# Altium PCB PCB.PcbDoc
Units mm, origin at the board's own origin, x right, y up, seen from the top; angles counter-clockwise.
Board outline 80 x 100 mm, 2 copper layers (Top Layer, Bottom Layer); 37 components, 24 nets, 95 pads, 0 vias.
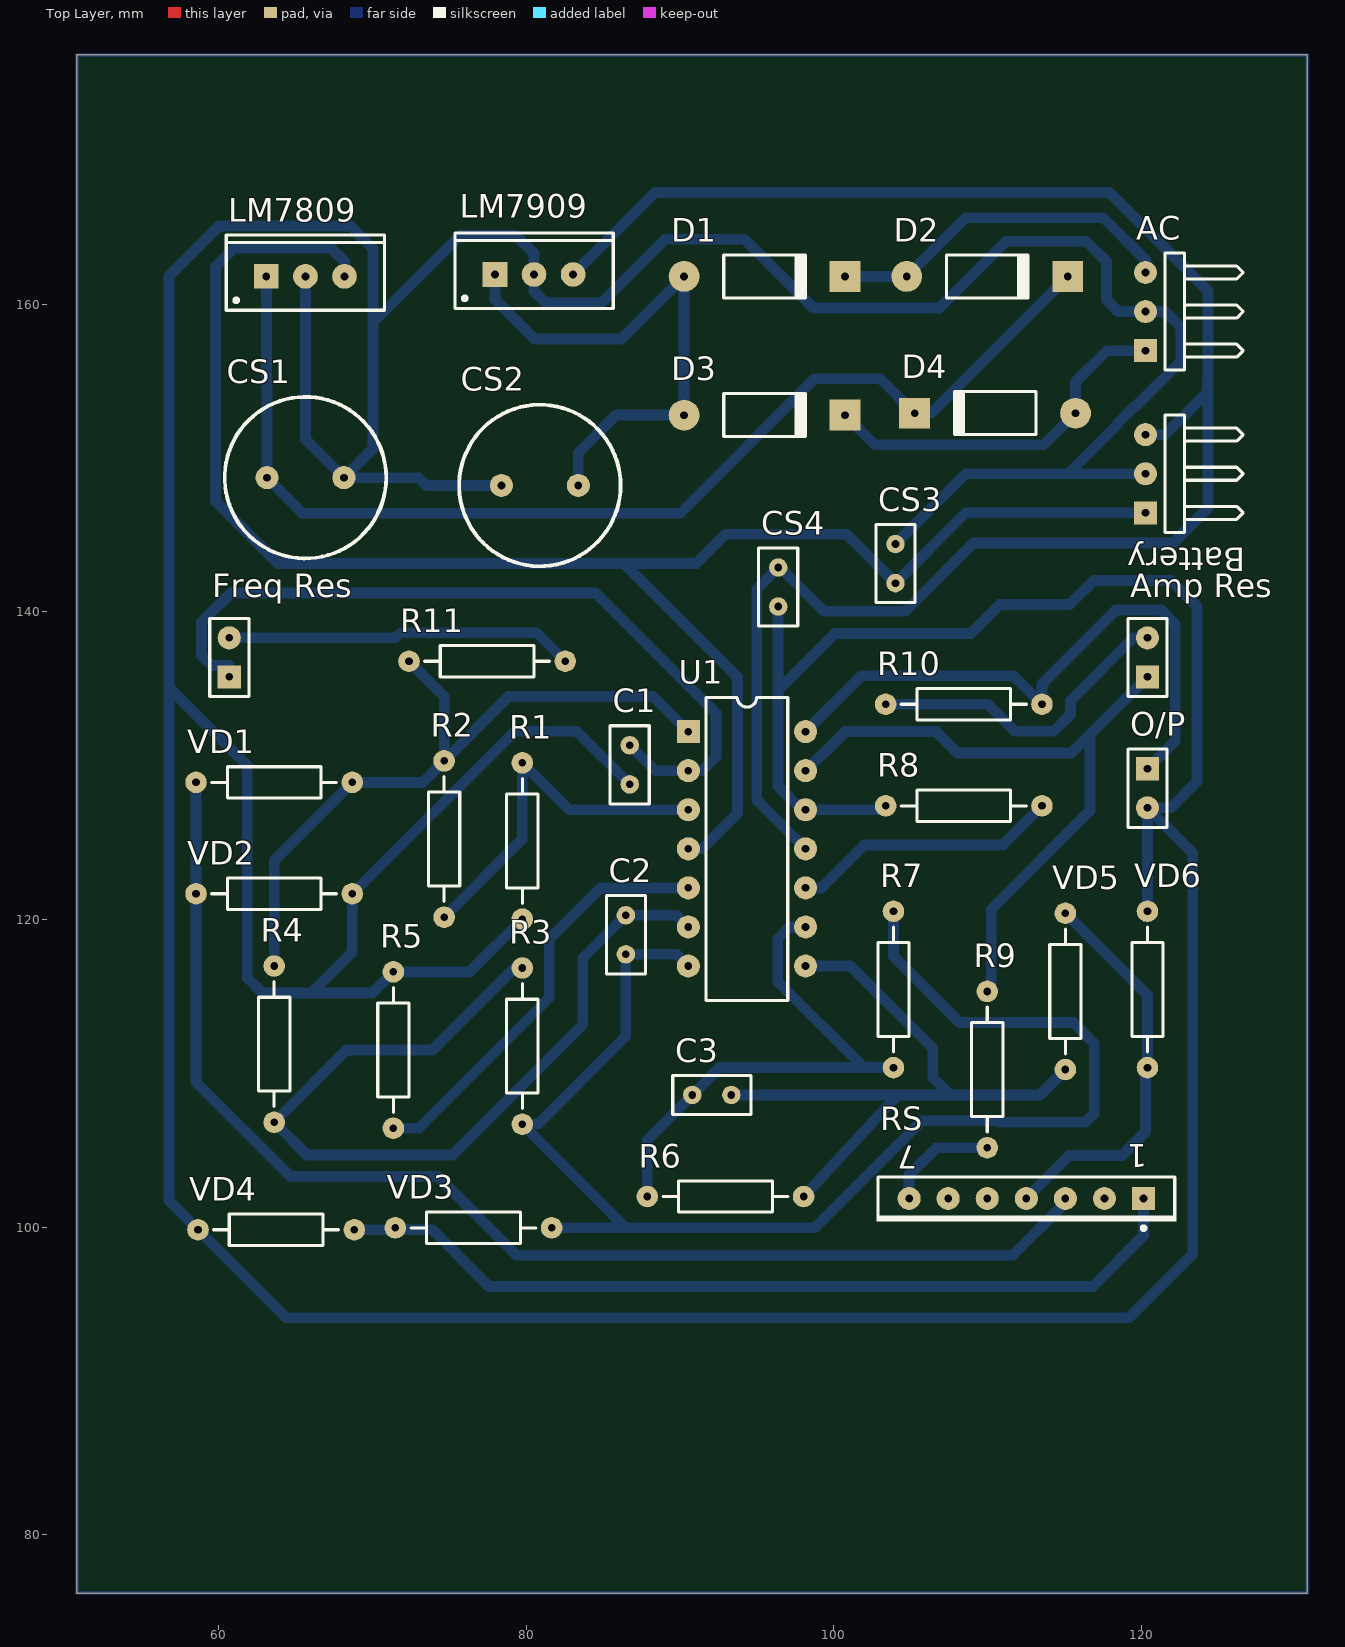
[diagram p0: Top Layer view]
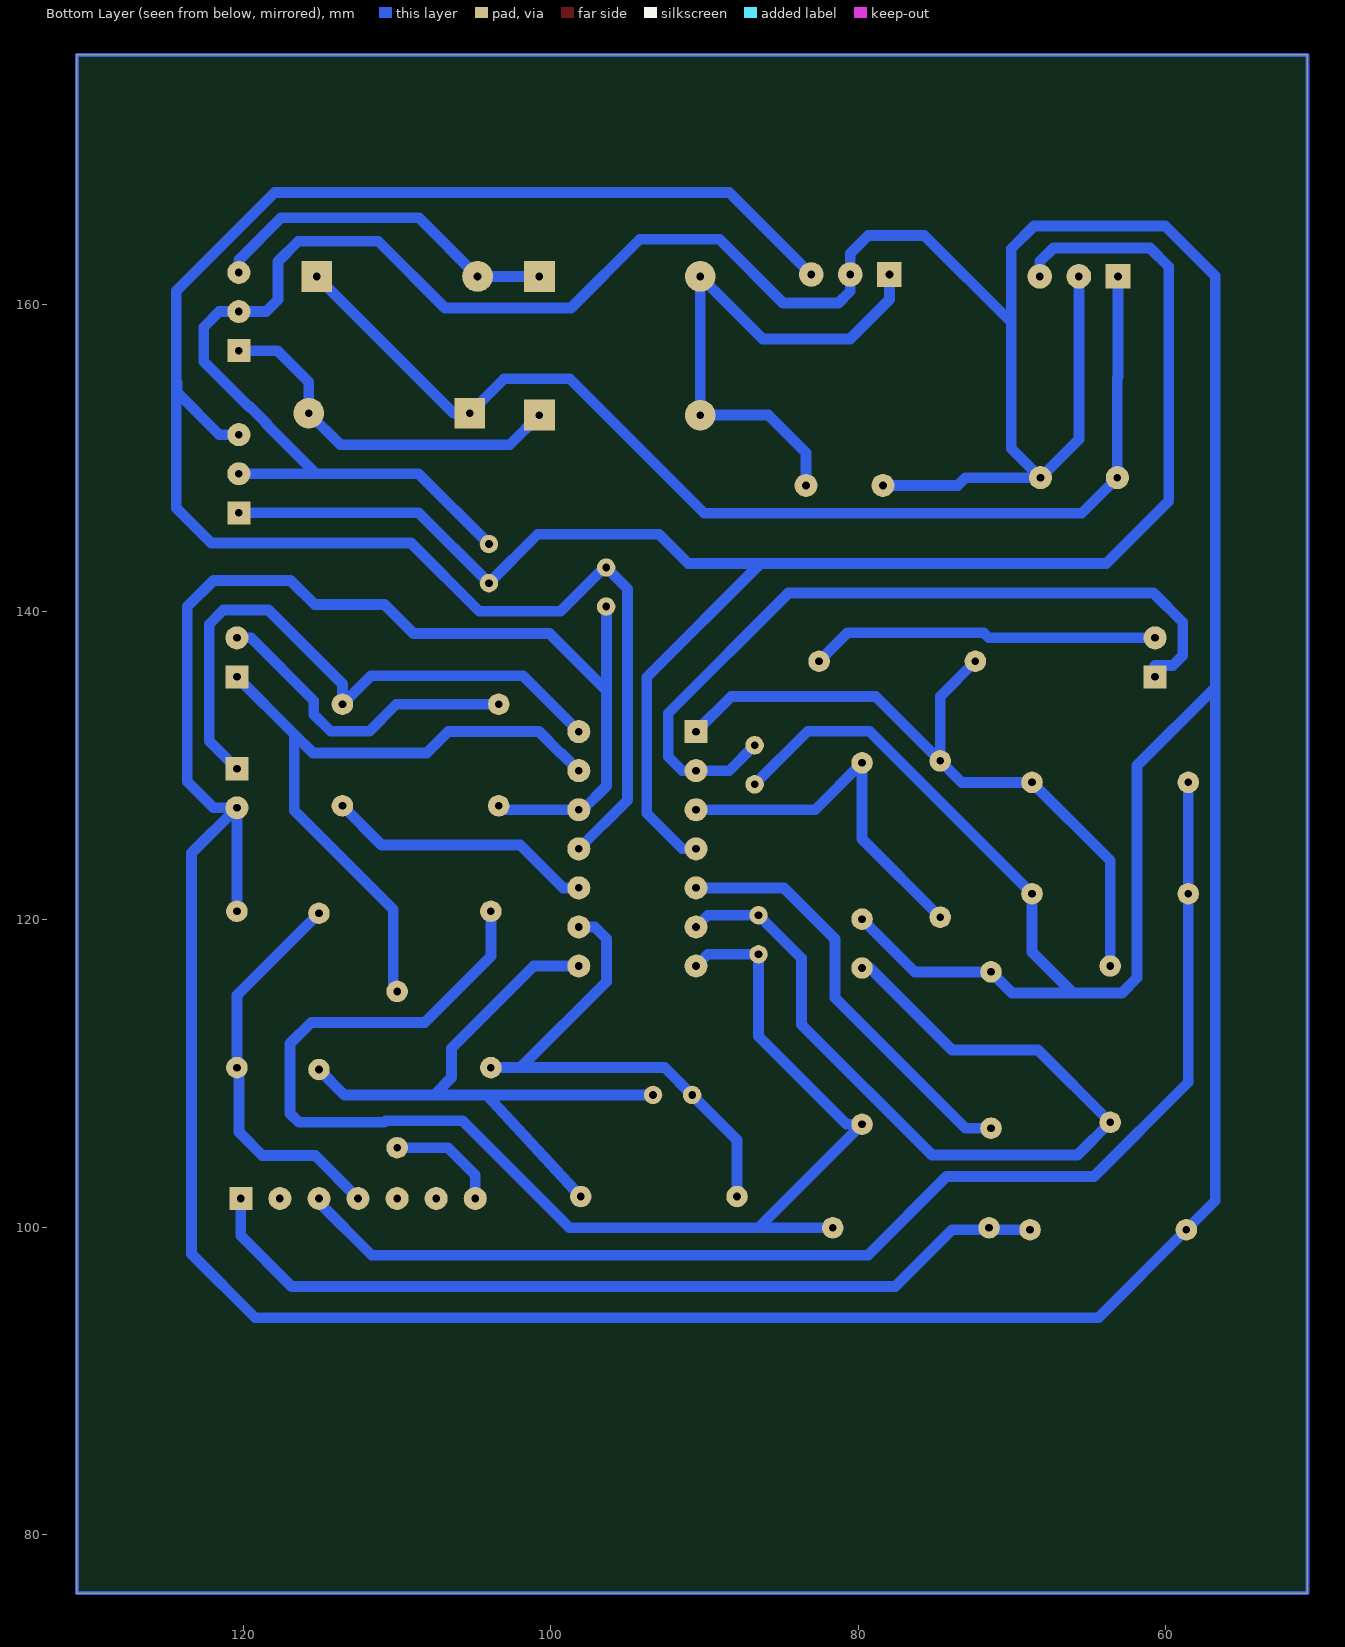
[diagram p1: Bottom Layer view, seen from below]

## Layer stack, top to bottom
Top Solder: solder mask 0.0102, Solder Resist, Dk 3.5
Top Layer: signal copper 0.0356
Dielectric 1: dielectric 0.32, FR-4, Dk 4.8
Bottom Layer: signal copper 0.0356
Bottom Solder: solder mask 0.0102, Solder Resist, Dk 3.5

## Board outline
50.8,76.2 130.8,76.2 130.8,176.2 50.8,176.2

## Design rules (kind name [scope] priority, off if disabled: settings)
Clearance "Clearance Under IC" [InNet('-VCC')] p1: gap=0.3
Clearance [All] p2: gap=0.7
PolygonConnect [All] p1: connectstyle=Relief reliefconductorwidth=0.254 reliefentries=4 polygonreliefangle="90 Angle" airgapwidth=0.254
RoomDefinition Schematic [InComponentClass('Schematic')] p1: confinementstyle=ConfineIn formatcopy=TRUE lockcomponents=FALSE outline 67.818,81.153 79.756,81.153 79.756,82.296 67.818,82.296
RoutingLayers [All] p1: top layer_v5=FALSE bottom layer_v5=TRUE
RoutingVias [All] p1: holewidth=0.3 width=0.8 viastyle="Through Hole" minholewidth=0.711 minwidth=1.27 maxholewidth=0.711 maxwidth=1.27
SolderMaskExpansion [All] p1: expansion=0.102
Width [All] p1: maxlimit=1 minlimit=0.6 preferedwidth=0.7
29 further rules are at their usual default settings.

## Components (designator, comment, footprint, x,y, rotation, side; value= is the part's Value field where it differs from the comment)
AC "Connector 1" HDR1X3H 120.269,156.972 r90 top
"Amp Res" "" HDR1X2 120.396,135.763 r90 top
Battery "" HDR1X3H 120.269,146.431 r90 top
C1 "Cap" RAD-0.1 86.741,130.048 r270 top
C2 "Cap" RAD-0.1 86.487,118.999 r90 top
C3 "" RAD-0.1 92.075,108.585 r180 top
CS1 "Cap Pol1" RB5-10.5 65.659,148.717 r0 top
CS2 "Cap Pol1" RB5-10.5 80.899,148.209 r0 top
CS3 "Cap" RAD-0.1 104.013,143.129 r270 top
CS4 "Cap" RAD-0.1 96.393,141.605 r270 top
D1 "Diode 1N4007" DO-41 95.504,161.798 r0 top
D2 "Diode 1N4007" DO-41 109.982,161.798 r0 top
D3 "Diode 1N4007" DO-41 95.504,152.781 r0 top
D4 "Diode 1N4007" DO-41 110.49,152.908 r180 top
"Freq Res" "" HDR1X2 60.706,135.763 r90 top
LM7809 "" TO-262-AA 65.659,161.798 r0 top
LM7909 "" TO-262-AA 80.518,161.925 r0 top
O/P "Connector 3" HDR1X2 120.396,129.794 r270 top
R1 "" AXIAL-0.4 79.756,125.095 r270 top
R2 "" AXIAL-0.4 74.676,125.222 r270 top
R3 "" AXIAL-0.4 79.756,111.76 r270 top
R4 "" AXIAL-0.4 63.627,111.887 r90 top
R5 "" AXIAL-0.4 71.374,111.506 r270 top
R6 "" AXIAL-0.4 92.964,101.981 r0 top
R7 "" AXIAL-0.4 103.886,115.443 r270 top
R8 "" AXIAL-0.4 108.458,127.381 r180 top
R9 "" AXIAL-0.4 109.982,110.236 r90 top
R10 "" AXIAL-0.4 108.458,133.985 r0 top
R11 "" AXIAL-0.4 77.47,136.779 r180 top
RS "" SW-7 112.522,101.854 r180 top
U1 "LM324" 646-06 94.361,124.587 r270 top
VD1 "" AXIAL-0.4 63.627,128.905 r180 top
VD2 "" AXIAL-0.4 63.627,121.666 r180 top
VD3 "" AXIAL-0.4 76.581,99.949 r0 top
VD4 "" AXIAL-0.4 63.754,99.822 r0 top
VD5 "" AXIAL-0.4 115.062,115.316 r90 top
VD6 "" AXIAL-0.4 120.396,115.443 r90 top

## Footprints (in the part's own frame and the unit in brackets; to place one, negate y for a bottom-side part, rotate by r counter-clockwise, add the part's x,y. Pads: shape width x height; smd on the part's side, far side on the other; paste and mask are expansions set on the pad)
646-06 [mm] "DIP; 14 Leads; Row Spacing 7.62 mm; Pitch 2.54 mm"
  rect 1.5x1.5 hole 0.5: 1(-7.62,-3.81)
  round 1.5 hole 0.5: 2(-5.08,-3.81) 3(-2.54,-3.81) 4(0,-3.81) 5(2.54,-3.81) 6(5.08,-3.81) 7(7.62,-3.81) 8(7.62,3.81) 9(5.08,3.81) 10(2.54,3.81) 11(0,3.81) 12(-2.54,3.81) 13(-5.08,3.81) 14(-7.62,3.81)
  silkscreen extent -9.85,-2.65 9.85,2.65
AXIAL-0.4 [mm] "Axial Device, Thru-Hole; 2 Leads; 0.4 in Pin Spacing"
  round 1.4 hole 0.5: 1(-5.08,0) 2(5.08,0)
  silkscreen extent -4.06,-1.02 4.06,1.02
DO-41 [mm] "Diode, Axial; Body 5.2 x 2.7 mm (LxDia. max), Lead Dia. 0.86 mm (max)"
  round 2 hole 0.5: 1(-5.23,0)
  rect 2x2 hole 0.5: 2(5.23,0)
  silkscreen extent -2.65,-1.4 2.75,1.4
HDR1X2 [mm] "Connector; Header; 2 Position"
  rect 1.5x1.5 hole 0.5: 1(0,0)
  round 1.5 hole 0.5: 2(2.54,0)
  silkscreen extent -1.27,-1.27 3.81,1.27
HDR1X3H [mm] "Connector; Header; 3 Position; Right Angle"
  rect 1.5x1.5 hole 0.5: 1(0,0)
  round 1.5 hole 0.5: 2(2.54,0) 3(5.08,0)
  silkscreen extent -1.27,-6.35 6.35,-1.27
RAD-0.1 [mm] "Radial Cap, Thru-Hole; 2 Leads; 0.1 in Pin Spacing"
  round 1.2 hole 0.5: 1(-1.27,0) 2(1.27,0)
  silkscreen extent -2.54,-1.27 2.54,1.27
RB5-10.5 [mm] "Capacitor (Radial); 2 Leads"
  round 1.5 hole 0.5: 1(-2.5,0) 2(2.5,0)
  silkscreen extent -5.25,-5.25 5.25,5.25
SW-7 [mm] "Switch; 7 Leads"
  rect 1.5x1.5 hole 0.5: 1(-7.62,0)
  round 1.5 hole 0.5: 2(-5.08,0) 3(-2.54,0) 4(0,0) 5(2.54,0) 6(5.08,0) 7(7.62,0)
  silkscreen extent -9.75,-1.4 9.75,2.05
TO-262-AA [mm] "TO, Thru-Hole, Vertical, Heatsink Mounted; 3 In-Line Leads; Pitch 2.54 mm"
  rect 1.6x1.6 hole 0.5: 1(-2.54,0)
  round 1.6 hole 0.5: 2(0,0) 3(2.54,0)
  silkscreen extent -5.15,-2.2 5.15,2.7, body extent -5.2,-2.25 5.2,2.75, height 19.7

## Part data
AC Battery: library part "Header 3H", "Header, 3-Pin, Right Angle"
"Amp Res" "Freq Res" O/P: library part "Header 2", "Header, 2-Pin"
C1 C2 CS3 CS4: "Capacitor"
C3: library part Cap, "Capacitor"
CS1 CS2: "Polarized Capacitor (Radial)"
D1 D2 D3 D4: "1 Amp General Purpose Rectifier"
LM7809 LM7909: library part "Volt Reg", "Voltage Regulator"
R1 R2 R3 R4 R5 R6 R7 R8 R9 R10 R11 VD1 VD2 VD3 VD4 VD5 VD6: library part Res1, "Resistor"
RS: library part SW-6WAY, "6 Way Switch"
U1: library part MC34074VP, "Single-Supply 3 to 44 V Operational Amplifier"

## Nets (pads, with @x,y where several pads share a name; then routed paths per layer and width w, separated by ;. In a path a pad name is that pad's centre, name@x,y a point inside that pad or via, vN(x,y) a via of type N, cw(c..) or ccw(c..) an arc to the next point about the centre after c; other vN are vias at no path point)
+VCC: Battery.1 CS3.2 LM7809.3 U1.4 | length 115
  Bottom Layer w0.7: LM7809.3 68.199,162.763 67.31,163.652 67.306,163.648 61.032,163.648 59.817,162.433 59.817,147.193 63.881,143.129 91.059,143.129 92.964,145.034 100.838,145.034 CS3.2 108.585,146.431 Battery.1 ; 86.36,143.129 93.751,135.738 93.751,126.898 91.44,124.587 U1.4
-VCC: Battery.3 CS4.1 LM7909.3 U1.11 | length 118.2
  Bottom Layer w0.7: LM7909.3 88.392,167.259 117.932,167.259 124.333,160.858 124.333,146.736 122.064,144.467 109.085,144.467 104.648,140.03 99.365,140.03 CS4.1@96.393,143.002 ; CS4.1 94.996,141.478 94.996,127.762 U1.11 ; Battery.3 121.539,151.511 124.282,154.254 124.282,154.889
GND: AC.2 Battery.2 C1.2 CS1.2 CS2.1 CS3.1 CS4.2 LM7809.2 LM7909.2 O/P.2 R1.2 R5.1 R8.2 U1.12 VD2.1 VD4.1 VD6.2 | length 459.3
  Bottom Layer w0.7: LM7809.2 65.659,151.217 CS1.2 ; 70.129,158.877 75.717,164.465 79.35,164.465 80.518,163.297 LM7909.2 80.518,160.837 81.28,160.075 84.891,160.075 89.027,164.211 94.209,164.211 98.679,159.741 106.865,159.741 111.209,164.084 116.411,164.084 117.729,162.766 117.729,160.274 118.491,159.512 AC.2 121.539,159.512 122.555,158.496 122.555,156.273 119.593,153.311 119.523,153.311 118.469,152.257 118.469,152.187 115.253,148.971 Battery.2 ; CS2.1 73.533,148.209 73.025,148.717 CS1.2 ; R1.2 76.327,116.586 R5.1 70.002,115.214 66.04,115.214 ; C1.2 83.287,132.232 79.273,132.232 VD2.1 68.707,117.881 66.04,115.214 ; CS4.2@96.371,140.313 96.371,134.874 ; U1.12@97.917,127.127 96.371,128.673 96.371,134.874 ; U1.12 R8.2@103.124,127.127 ; CS3.1 108.585,148.971 115.037,148.971 ; VD6.2 O/P.2 ; 56.794,135.077 56.794,161.823 60.046,165.075 68.58,165.075 70.053,163.601 70.053,150.611 CS1.2 ; 56.794,135.077 61.874,129.997 61.874,116.205 62.865,115.214 66.04,115.214 ; 56.794,135.077 56.794,101.702 VD4.1 64.389,94.107 119.202,94.107 123.342,98.247 123.342,124.308 O/P.2 ; 96.371,134.874 100.079,138.582 108.915,138.582 110.795,140.462 115.341,140.462 116.916,142.037 121.92,142.037 123.622,140.335 123.622,128.956 121.92,127.254 O/P.2
NetAC_1: AC.1 D3.2 D4.1 | length 24.1
  Bottom Layer w0.7: D3.2 102.664,150.851 113.663,150.851 D4.1 115.72,154.94 117.752,156.972 AC.1
NetAC_3: AC.3 D1.2 D2.1 | length 23.1
  Bottom Layer w0.7: D1.2 D2.1 108.562,165.608 117.526,165.608 120.269,162.865 AC.3
"NetAmp Res_1": "Amp Res.1" R9.2 U1.13 | length 45
  Bottom Layer w0.7: U1.13 99.289,130.785 99.339,130.785 100.762,132.207 106.655,132.207 108.052,130.81 115.443,130.81 116.662,132.029 ; R9.2@110.236,115.57 110.236,120.65 116.662,127.076 116.662,132.029 ; 120.396,135.763 116.662,132.029
"NetAmp Res_2": "Amp Res.2" R10.1 | length 20.8
  Bottom Layer w0.7: R10.1 110.033,133.985 111.785,132.232 114.3,132.232 115.394,133.327 115.394,134.218 119.479,138.303 120.396,138.303
NetC1_1: "Freq Res.1" C1.1 U1.2 | length 51.9
  Bottom Layer w0.7: 60.706,135.763 60.706,136.503 59.563,136.503 58.906,137.16 58.906,139.319 60.811,141.224 84.531,141.224 92.351,133.404 92.351,130.578 91.44,129.667 U1.2 88.392,129.667 C1.1
NetC2_1: C2.1 R3.2 R7.1 U1.7 VD3.2 | length 89.6
  Bottom Layer w0.7: VD3.2 86.487,99.949 ; U1.7 89.789,117.729 C2.1 86.487,112.395 80.772,106.68 R3.2 86.487,99.949 ; R7.1 103.886,117.602 108.186,113.302 115.57,113.302 116.942,111.931 116.942,107.38 116.369,106.807 110.806,106.807 110.707,106.906 105.738,106.906 98.781,99.949 86.487,99.949
NetC2_2: C2.2 R3.1 R4.1 U1.6 | length 57.4
  Bottom Layer w0.7: R3.1 79.248,116.84 73.914,111.506 68.326,111.506 R4.1 65.758,104.676 75.212,104.676 83.693,113.157 83.693,117.475 C2.2 89.789,120.269 U1.6
NetC3_1: C3.1 R6.2 U1.8 VD5.1 | length 45.4
  Bottom Layer w0.7: C3.1 104.179,108.585 ; R6.2 104.179,108.585 ; U1.8 101.092,116.967 106.439,111.62 106.439,109.715 107.569,108.585 ; VD5.1 113.411,108.585 107.569,108.585 ; 104.179,108.585 107.569,108.585
NetC3_2: C3.2 R6.1 R7.2 U1.9 | length 34.4
  Bottom Layer w0.7: R6.1 87.884,105.664 C3.2 92.583,110.363 101.956,110.363 ; U1.9 97.13,119.507 96.368,118.745 96.368,115.951 101.956,110.363 ; R7.2 101.956,110.363
NetCS1_1: CS1.1 D2.2 D4.2 LM7809.1 | length 74.3
  Bottom Layer w0.7: LM7809.1 63.119,155.259 63.159,155.219 CS1.1 65.47,146.406 90.021,146.406 98.759,155.143 103.025,155.143 D4.2 106.322,152.908 D2.2
NetCS2_2: CS2.2 D1.1 D3.1 LM7909.1 | length 35.7
  Bottom Layer w0.7: LM7909.1 77.978,160.299 80.543,157.734 86.21,157.734 D1.1 D3.1 85.852,152.781 83.399,150.328 CS2.2
"NetFreq Res_2": "Freq Res.2" R11.1 | length 22.7
  Bottom Layer w0.7: 60.706,138.303 71.526,138.303 71.857,138.633 80.696,138.633 R11.1
NetO/P_1: O/P.1 R10.2 U1.14 | length 40.1
  Bottom Layer w0.7: U1.14 101.803,135.839 111.684,135.839 R10.2 113.538,135.293 118.351,140.106 121.285,140.106 122.199,139.192 122.199,131.597 O/P.1
NetR1_1: R1.1 R2.2 U1.3 | length 24.2
  Bottom Layer w0.7: R2.2 79.756,125.222 R1.1 82.804,127.127 U1.3
NetR2_1: R2.1 R4.2 R11.2 U1.1 VD1.1 | length 46.6
  Bottom Layer w0.7: R4.2 63.627,123.825 VD1.1 73.279,128.905 R2.1 ; R11.2 74.676,134.493 R2.1 ; U1.1 88.265,134.493 78.867,134.493 R2.1
NetR5_2: R5.2 U1.5 | length 27.9
  Bottom Layer w0.7: R5.2 73.025,106.426 81.509,114.91 81.509,118.72 84.836,122.047 U1.5
NetR8_1: R8.1 U1.10 | length 17.6
  Bottom Layer w0.7: U1.10 99.187,122.047 101.981,124.841 110.998,124.841 R8.1
NetR9_1: R9.1 RS.7 | length 7.3
  Bottom Layer w0.7: RS.7 104.902,103.378 106.68,105.156 R9.1
NetRS_1: RS.1 VD3.1 VD4.2 | length 56.6
  Bottom Layer w0.7: VD4.2 73.914,99.822 77.597,96.139 116.84,96.139 120.142,99.441 RS.1
NetRS_3: RS.3 VD1.2 VD2.2 | length 82.3
  Bottom Layer w0.7: VD1.2 VD2.2 58.547,109.412 64.683,103.276 74.27,103.276 79.375,98.171 111.633,98.171 115.062,101.6 RS.3
NetRS_4: RS.4 VD5.2 VD6.1 | length 26
  Bottom Layer w0.7: RS.4 112.522,101.86 115.31,104.648 118.745,104.648 120.269,106.172 120.269,110.236 VD6.1 120.396,115.062 VD5.2
pads on no net: RS.2 RS.5 RS.6
copper on no net: | length 360
  Bottom Layer w0.254: 50.8,76.2 50.8,176.2 130.8,176.2 130.8,76.2 50.8,76.2

## Other copper
Bottom Layer:

## Text inside footprints (layer, text, board x,y; h text height)
RS: Top Overlay "7" at 105.438,105.299 h1.5 r180; Top Overlay "1" at 120.373,105.38 h1.5 r180